# EAGLE board testSchematic (EAGLE 9.6.2)

Size 166.04 x 80 mm. Coordinates in mm from the lower left corner, seen from the top.
Outline: 0,0 166.04,0 166.04,80 0,80 0,0
Copper layers (1*16): Top 0.035mm / dielectric 1.5mm / Bottom 0.035mm
Design rules "default": minimum track width 6mil, minimum drill 0.35mm, track to track 6mil, track to pad 6mil, pad to pad 6mil, via to via 6mil, smd to smd 6mil, copper to edge 40mil, drill to drill 6mil, minimum pad ring 10mil, minimum via ring 8mil, stop-mask expansion 4mil, vias tented up to drill 0mil, thermal gap 10mil

## Footprints (pad centres in the part's own frame; a part is rotated, then mirrored left to right if it is on the bottom)
DIOAD2120W130L950D530P = drill 1.5 pad 2.25: A 10.6,0 | drill 1.5 pad 2.25 square: C -10.6,0
DIOAD1060W80L520D270 = drill 1.1 pad 1.65: A 5.3,0 | drill 1.1 pad 1.65 square: C -5.3,0
DCJ0303 = drill 1 pad 2 long: 1 0,3.1; 2 4.8,0; 3 0,-3
DIL04 = drill 0.813 offset: 1 -1.27,-3.81; 2 1.27,-3.81; 3 1.27,3.81; 4 -1.27,3.81
0204/7 = drill 0.813 octagon: 1 -3.81,0; 2 3.81,0
SW_TL2230OAF140 = drill 0.8 square: 1 -2,2.5 | drill 0.8: 2 0,2.5; 3 2,2.5; 4 -2,-2.5; 5 0,-2.5; 6 2,-2.5
TO220 = drill 1.118 long: 1 -2.54,-6.35; 2 0,-6.35; 3 2.54,-6.35 | hole 3.302: 0,11.176
ESP12E-SMD = smd 3 x 1.2: ADC -8.3,3.8; CH_PD -8.3,1.8; GND 8.1,-8.2; GPIO0 8.1,-2.2; GPIO2 8.1,-4.2; GPIO4 8.1,-0.2; GPIO5 8.1,1.8; GPIO12 -8.3,-4.2; GPIO13 -8.3,-6.2; GPIO14 -8.3,-2.2; GPIO15 8.1,-6.2; GPIO16 -8.3,-0.2; RESET -8.3,5.8; RXD0 8.1,3.8; TXD0 8.1,5.8; VCC -8.3,-8.2 | smd 1.2 x 3: CS0 -4.8,-10.3; GPIO9 -0.8,-10.3; GPIO10 1.2,-10.3; MISO -2.8,-10.3; MOSI 3.2,-10.3; SCLK 5.2,-10.3
BLUE_PILL = drill 0.8 long: P$1 -7.62,15.24; P$2 -7.62,12.7; P$3 -7.62,10.16; P$4 -7.62,7.62; P$5 -7.62,5.08; P$6 -7.62,2.54; P$7 -7.62,0; P$8 -7.62,-2.54; P$9 -7.62,-5.08; P$10 -7.62,-7.62; P$11 -7.62,-10.16; P$12 -7.62,-12.7; P$13 -7.62,-15.24; P$14 -7.62,-17.78; P$15 -7.62,-20.32; P$16 -7.62,-22.86; P$17 -7.62,-25.4; P$18 -7.62,-27.94; P$19 -7.62,-30.48; P$20 -7.62,-33.02; P$21 7.62,15.24; P$22 7.62,12.7; P$23 7.62,10.16; P$24 7.62,7.62; P$25 7.62,5.08; P$26 7.62,2.54; P$27 7.62,0; P$28 7.62,-2.54; P$29 7.62,-5.08; P$30 7.62,-7.62; P$31 7.62,-10.16; P$32 7.62,-12.7; P$33 7.62,-15.24; P$34 7.62,-17.78; P$35 7.62,-20.32; P$36 7.62,-22.86; P$37 7.62,-25.4; P$38 7.62,-27.94; P$39 7.62,-30.48; P$40 7.62,-33.02
LM2596_MODULE = drill 2.54 pad 3.81 square: IN+ -20.955,8.255; IN- -20.879,-8.077; OUT+ 18.364,8.306; OUT- 18.44,-8.306
AMS1117_MODULE = drill 0.6 long: GND -10.922,-0.559; GND- 9.982,-0.432; VIN+ -10.922,1.981; VOUT+ 9.982,2.108
W237-102 = drill 1.194 long: 1 -2.5,-1.27; 2 2.5,-1.27

## Placement (x,y rotation side)
D1  1N5822  [DIOAD2120W130L950D530P]  133.35,72.39 0 top
D2  1N4007  [DIOAD1060W80L520D270]  -22.86,-308.61 0 top  (outside the outline)
J1  [DCJ0303]  152.4,71.12 90 top
OK1  PC817  [DIL04]  86.36,54.61 0 top
OK2  PC817  [DIL04]  -24.13,-193.04 0 top  (outside the outline)
OK3  PC817  [DIL04]  -24.13,-224.79 0 top  (outside the outline)
OK4  PC817  [DIL04]  -13.97,-224.79 0 top  (outside the outline)
OK5  PC817  [DIL04]  -24.13,-256.54 0 top  (outside the outline)
OK6  PC817  [DIL04]  -13.97,-256.54 0 top  (outside the outline)
OK7  PC817  [DIL04]  -3.81,-256.54 0 top  (outside the outline)
OK8  PC817  [DIL04]  -24.13,-269.24 0 top  (outside the outline)
R1  [0204/7]  -25.4,-3.81 0 top  (outside the outline)
R2  [0204/7]  -25.4,-8.89 0 top  (outside the outline)
R3  [0204/7]  -25.4,-212.09 0 top  (outside the outline)
R4  [0204/7]  -25.4,-217.17 0 top  (outside the outline)
R5  [0204/7]  -25.4,-243.84 0 top  (outside the outline)
R6  [0204/7]  -15.24,-243.84 0 top  (outside the outline)
R7  [0204/7]  -25.4,-248.92 0 top  (outside the outline)
R8  [0204/7]  -15.24,-248.92 0 top  (outside the outline)
R9  [0204/7]  -3.81,-278.13 0 top  (outside the outline)
R10  [0204/7]  -25.4,-288.29 0 top  (outside the outline)
R11  [0204/7]  -15.24,-288.29 0 top  (outside the outline)
R12  [0204/7]  -5.08,-288.29 0 top  (outside the outline)
R13  [0204/7]  -25.4,-293.37 0 top  (outside the outline)
R14  [0204/7]  -15.24,-293.37 0 top  (outside the outline)
R15  [0204/7]  -5.08,-293.37 0 top  (outside the outline)
R16  [0204/7]  -25.4,-298.45 0 top  (outside the outline)
R17  [0204/7]  -25.4,-303.53 0 top  (outside the outline)
S1  TL2230OAF140  [SW_TL2230OAF140]  114.3,69.85 0 top
T1  TIP122  [TO220]  62.23,44.45 0 top
U1  ESP12ESMD  [ESP12E-SMD]  40.64,17.78 0 top
U$1  [BLUE_PILL]  15.24,38.1 0 top
U$2  [LM2596_MODULE]  -6.35,-165.1 0 top  (outside the outline)
U$3  AMS1117_MODULE  [AMS1117_MODULE]  -16.51,-181.61 0 top  (outside the outline)
X1  [W237-102]  8.89,72.39 0 top
X2  [W237-102]  -24.13,-203.2 0 top  (outside the outline)
X3  [W237-102]  -24.13,-234.95 0 top  (outside the outline)
X4  [W237-102]  -13.97,-234.95 0 top  (outside the outline)
X5  [W237-102]  -13.97,-266.7 0 top  (outside the outline)
X6  [W237-102]  -3.81,-266.7 0 top  (outside the outline)
X7  [W237-102]  -24.13,-279.4 0 top  (outside the outline)
X8  [W237-102]  -13.97,-279.4 0 top  (outside the outline)
X9  [W237-102]  -24.13,-316.23 0 top  (outside the outline)

## Library data of the parts
D1 = 1N5822; AVAILABILITY: Not in stock; CHECK_PRICES: https://www.snapeda.com/parts/1N5822/Onsemi/view-part/?ref=eda; DESCRIPTION: Diode; Diode Type:Schottky; Repetitive Reverse Voltage Max, Vrrm:40V; Forward Current, If(AV):3A; Forward Surge Current Max, Ifsm:80A; Forward Voltage Max, VF:0.525V; Junction Temperature, Tj max:125°C ;RoHS Compliant: Yes; MF: ON Semiconductor; MP: 1N5822; PACKAGE: AXIAL LEAD-2 ON Semiconductor; PRICE: None; SNAPEDA_LINK: https://www.snapeda.com/parts/1N5822/Onsemi/view-part/?ref=snap
D2 = 1N4007; AVAILABILITY: In Stock; CHECK_PRICES: https://www.snapeda.com/parts/1N4007/Onsemi/view-part/?ref=eda; DESCRIPTION: Diode Standard 1000V 1A Through Hole DO-204AL (DO-41); MF: ON Semiconductor; MP: 1N4007; PACKAGE: DO-41-2 ON Semiconductor; PRICE: None; SNAPEDA_LINK: https://www.snapeda.com/parts/1N4007/Onsemi/view-part/?ref=snap
J1 = con-jack; OC_FARNELL: unknown; OC_NEWARK: unknown
OK1-OK8 = optocoupler; MPN: PC817X4J000F; OC_FARNELL: 9707727; OC_NEWARK: 97K7059
R1-R17 = rcl; SPICEPREFIX: R
S1 = TL2230OAF140 switch; AVAILABILITY: In Stock; CHECK_PRICES: https://www.snapeda.com/parts/TL2230OAF140/E-Switch/view-part/?ref=eda; DESCRIPTION: Pushbutton Switch DPDT Standard Through Hole; MF: E-Switch; MP: TL2230OAF140; PACKAGE: None; PRICE: None; PURCHASE-URL: https://pricing.snapeda.com/search?q=TL2230OAF140&ref=eda; SNAPEDA_LINK: https://www.snapeda.com/parts/TL2230OAF140/E-Switch/view-part/?ref=snap
T1 = TIP122; AVAILABILITY: In Stock; CHECK_PRICES: https://www.snapeda.com/parts/TIP122/EMI/view-part/?ref=eda; DESCRIPTION: Bipolar (BJT) Transistor NPN - Darlington 100 V 5 A - 2 W Through Hole TO-220; MF: onsemi; MP: TIP122; PACKAGE: TO-220-3 ON Semiconductor; PRICE: None; PURCHASE-URL: https://pricing.snapeda.com/search?q=TIP122&ref=eda; SNAPEDA_LINK: https://www.snapeda.com/parts/TIP122/EMI/view-part/?ref=snap
U1 = ESP12E; AVAILABILITY: Not in stock; CHECK_PRICES: https://www.snapeda.com/parts/ESP-12E/AI-Thinker/view-part/?ref=eda; DESCRIPTION: FLEXYPIN ADAPTER - ESP-07/ESP-12; MF: AI-Thinker; MP: ESP-12E; PACKAGE: Package; PRICE: None; SNAPEDA_LINK: https://www.snapeda.com/parts/ESP-12E/AI-Thinker/view-part/?ref=snap
U$1 = BluePill
U$2 = buck
U$3 = AMS1117_Module
X1-X9 = con-wago-500; MPN: 237-102; OC_FARNELL: unknown; OC_NEWARK: 70K9898

## Nets
+3V3: R2.1 R4.1 R6.1 R8.1 R10.1 R12.1 R14.1 R16.1 U$3.VOUT+
+5V: U$2.OUT+ U$3.VIN+
+12V: D2.C S1.2 U$2.IN+ X1.1 X2.1 X3.1 X4.1 X5.1 X6.1 X7.1 X8.1 X9.2
GND: J1.2 J1.3 OK1.2 OK1.3 OK2.2 OK2.3 OK3.2 OK3.3 OK4.2 OK4.3 OK5.2 OK5.3 OK6.2 OK6.3 OK7.2 OK7.3 OK8.2 OK8.3 T1.3 U$2.IN- U$2.OUT- U$3.GND U$3.GND-
GND1: U$1.P$21
HOOTER_PIN: R17.2
N$1: D1.A J1.1
N$2: D1.C S1.3
N$3: OK2.1 R3.1
N$4: R3.2 X2.2
N$5: OK1.1 R1.1
N$6: OK3.1 R5.1
N$7: R5.2 X3.2
N$8: OK4.1 R7.1
N$9: R7.2 X4.2
N$10: OK5.1 R9.1
N$11: R9.2 X5.2
N$12: OK6.1 R11.1
N$13: R11.2 X6.2
N$14: OK7.1 R13.1
N$15: R13.2 X7.2
N$16: OK8.1 R15.1
N$17: R15.2 X8.2
N$18: R17.1 T1.1
N$19: D2.A T1.2 X9.1
N$20: R1.2 X1.2
UCTLR_PIN_: OK1.4 OK2.4 OK3.4 OK4.4 OK5.4 OK6.4 OK7.4 OK8.4 R2.2 R4.2 R6.2 R8.2 R10.2 R12.2 R14.2 R16.2

## Tracks (layer width: path | path; a pad name or v marks a point on that pad's centre or on a via)
+3V3  (8 unrouted)
+5V  (1 unrouted)
+12V  (11 unrouted)
GND  (22 unrouted)
N$1  (1 unrouted)
N$2  (1 unrouted)
N$3  (1 unrouted)
N$4  (1 unrouted)
N$5  (1 unrouted)
N$6  (1 unrouted)
N$7  (1 unrouted)
N$8  (1 unrouted)
N$9  (1 unrouted)
N$10  (1 unrouted)
N$11  (1 unrouted)
N$12  (1 unrouted)
N$13  (1 unrouted)
N$14  (1 unrouted)
N$15  (1 unrouted)
N$16  (1 unrouted)
N$17  (1 unrouted)
N$18  (1 unrouted)
N$19  (2 unrouted)
N$20  (1 unrouted)
UCTLR_PIN_  (15 unrouted)